# EAGLE board g1ata_stand alone master (EAGLE 9.6.2)
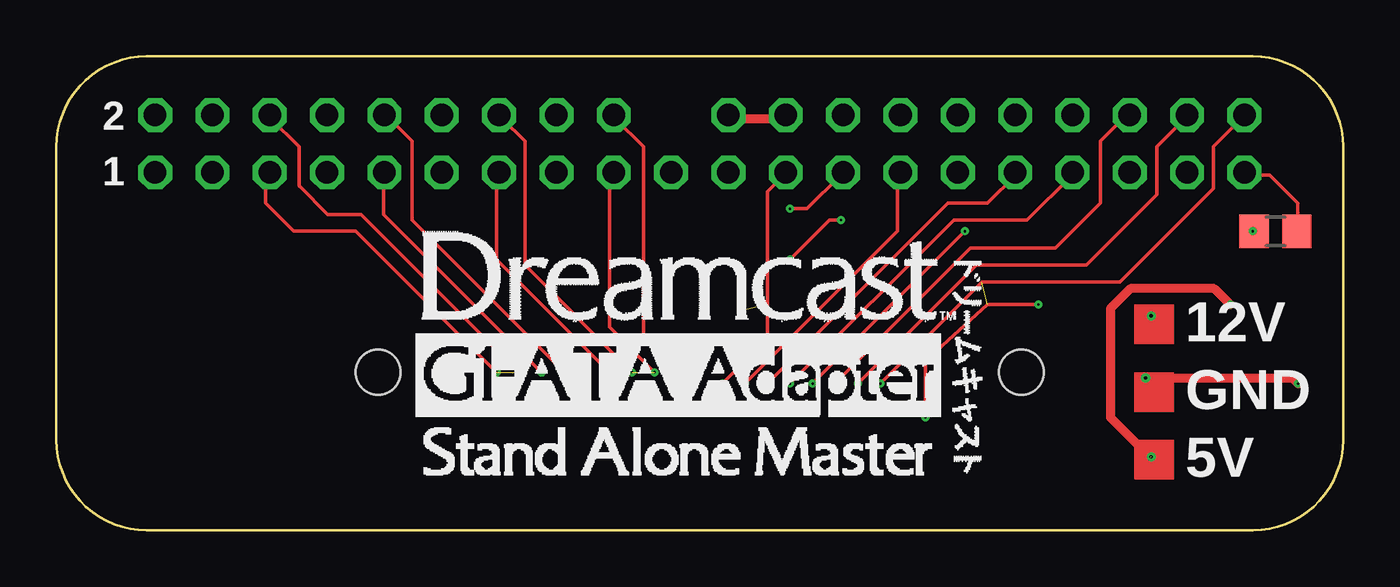
[diagram p0: board, top side]
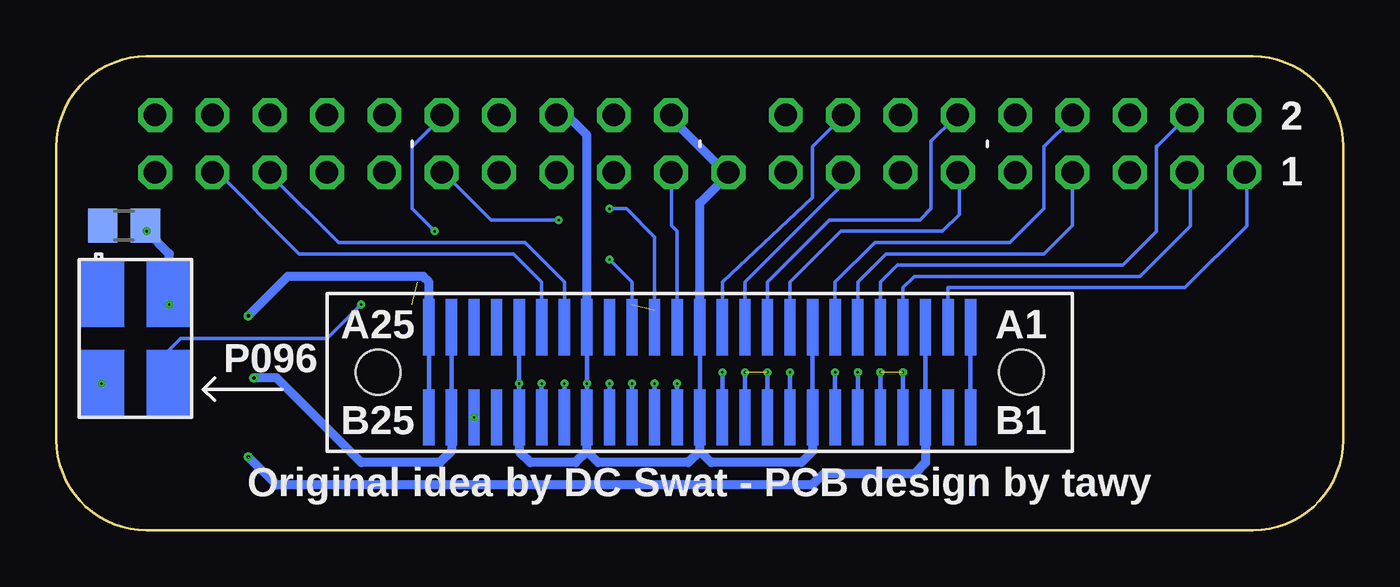
[diagram p1: board, bottom side, seen from below]

Size 57 x 21 mm. Coordinates in mm from the lower left corner, seen from the top.
Outline: 4,21 53,21 arc-90 57,17 57,4 arc-90 53,0 4,0 arc-90 0,4 0,17 arc-90 4,21
Copper layers (1*16): Top 0.035559375mm / dielectric 1.6mm / Bottom 0.035559375mm
Design rules "oshpark-2layer *": minimum track width 6mil, minimum drill 10mil, track to track 6mil, track to pad 6mil, pad to pad 6mil, via to via 6mil, smd to smd 6mil, copper to edge 15mil, drill to drill 6mil, minimum pad ring 5mil, minimum via ring 5mil, stop-mask expansion 2.5mil, vias tented up to drill 10mil, thermal gap 10mil
Holes 2 mm at 14.25,7 42.75,7

## Footprints (pad centres in the part's own frame; a part is rotated, then mirrored left to right if it is on the bottom)
R0805 = smd 1.3 x 1.5: 1 -0.95,0; 2 0.95,0

## Placement (x,y rotation side)
1K5  [R0805]  54,13.5 0 bottom
1K6  [R0805]  54,13.25 0 top

## Library data of the parts
1K5 1K6 = resistor

## Tracks (layer width: path | path; a pad name or v marks a point on that pad's centre or on a via)
5V2  (via drill 0.1, 0.15)  (1 unrouted)
  Top 0.406: v52,10 51.29,10.71 47.58,10.71 46.69,9.82 46.69,5 48.47,3.22
  Bottom 0.406: v48.5,3.25 47.25,2 23.5,2 23,2.5 19,2.5 18.5,3 18.5,4 | 52.5,10.5 v52,10 52,12.25 v53,13.25
12V2  (via drill 0.15)
  Bottom 0.406: 40.5,10 40.5,11 40.75,11.25 46.75,11.25 v48.5,9.5
GND4
  Bottom 0.406: 29.75,18.25 27.25,15.75 28.5,14.5 28.5,9.5
GND5
  Top 0.406: 29.75,18.25 32.25,18.25
P1/A3
  Bottom 0.152: 4.27,15.73 4.27,13.48 7,10.75 17.5,10.75 17.5,10
P3/A2
  Bottom 0.152: 6.77,15.73 6.77,13.48 9,11.25 19,11.25 19.5,10.75 19.5,10
P4/A2
  Bottom 0.152: 8.27,17.02 8.27,13.23 9.75,11.75 19.75,11.75 20.5,11 20.5,10.25
P5/B2  (via drill 0.1)  (1 unrouted)
  Top 0.152: v19.5,7 13.25,13.25 10.51,13.25 9.27,14.5 9.27,15.98
  Bottom 0.203: v19.5,7 19.5,5.5 | 20.5,7 20.5,5.5
P6/B2  (via drill 0.1)
  Top 0.152: 10.77,15.25 12.02,14 13.5,14 v20.5,7
P7/A2
  Bottom 0.152: 21.5,10 21.5,11 20.25,12.25 13.25,12.25 12,13.5 12,15.75
P8/A2
  Bottom 0.152: 12,18.25 13.25,17 13.25,14.25 14.75,12.75 20.75,12.75 22.5,11 22.5,10
P9/B2  (via drill 0.1)
  Top 0.152: 14.5,15.75 14.5,14 v21.5,7
  Bottom 0.203: v21.5,7 21.5,5.75
P10/B2  (via drill 0.1)
  Top 0.152: v22.5,7 15.75,13.75 15.75,17.25 14.75,18.25
  Bottom 0.203: v22.5,7 22.5,5.75
P11/A2
  Bottom 0.152: 17,15.75 17,14 17.75,13.25 22.25,13.25 24.5,11 24.5,10
P12/A2
  Bottom 0.152: 25.5,10 25.5,11 22.75,13.75 18.75,13.75 18.25,14.25 18.25,17.25 17.25,18.25
P13/B2  (via drill 0.1)
  Top 0.152: 19.5,15.75 19.5,12 v24.5,7
  Bottom 0.203: v24.5,7 24.5,5.5
P14/B2  (via drill 0.1)
  Top 0.152: 19.75,18.25 20.75,17.25 20.75,11.75 v25.5,7
P15/A2
  Bottom 0.152: 22,15.5 26.5,11 26.5,9.75
P16/A2
  Bottom 0.152: 27.5,10 27.5,11 23.5,14.75 23.5,17 22.5,18
P17/B2  (via drill 0.1)  (1 unrouted)
  Top 0.152: 24.5,16 24.5,9 v26.5,7
  Bottom 0.203: v26.5,7 26.5,5.25 | 25.5,7 25.5,5.25
P18/B2  (via drill 0.1)
  Top 0.152: 24.75,18.25 26,17 26,8.5 v27.5,7
  Bottom 0.203: v27.5,7 27.5,5.5
P21/A2
  Bottom 0.152: 29.5,10 29.5,13.25 29.75,13.5 29.75,15.75
P23/B2  (via drill 0.1)
  Top 0.152: v29.5,6.5 31.5,8.5 31.5,15 32.25,15.75
  Bottom 0.203: v29.5,6.5 29.5,5.75
P26/A2
  Bottom 0.406: 33.5,10 33.5,17.5 34.75,18.75
P27/B2  (via drill 0.1)
  Top 0.152: 37.25,15.75 37.25,13.25 v30.5,6.5
  Bottom 0.203: v30.5,6.5 30.5,5.5
P29/A2  (via drill 0.1)  (1 unrouted)
  Top 0.152: v32.5,12 34.25,13.75 v34.75,13.75 | v32.5,14.25 33.25,14.25 34.75,15.75
  Bottom 0.152: 30.5,9.75 30.5,13 31.75,14.25 v32.5,14.25 | v32.5,12 31.5,11 31.5,10 | 40,16 37.75,13.75 v34.75,13.75
P30/B2  (via drill 0.1)
  Top 0.152: v40.25,13.25 v33.5,6.5
  Bottom 0.152: v40.25,13.25 41.25,14.25 41.25,17 40,18.25
  Bottom 0.203: 33.5,5.75 v33.5,6.5 33.5,8.25
P31/B2  (via drill 0.1)
  Top 0.152: v31.5,6.5 39.5,14.5 41.25,14.5 42.5,15.75
  Bottom 0.203: v31.5,6.5 31.5,5.5
P33/B2  (via drill 0.1)
  Top 0.152: v32.5,6.5 39.75,13.75 43,13.75 45,15.75
  Bottom 0.203: v32.5,6.5 32.5,5.75
P35/A2
  Bottom 0.152: 34.5,10 34.5,11 36.25,12.75 44.5,12.75 47.5,15.75
P36/B2  (via drill 0.1)
  Top 0.152: v34.5,6.5 40.5,12.5 44.25,12.5 46.25,14.5 46.25,17.25 47.25,18.25
  Bottom 0.203: v34.5,6.5 34.5,5.75
P37/A2
  Bottom 0.152: 35.5,10 35.5,11 36.75,12.25 46.25,12.25 50,16
P38/B2  (via drill 0.1)
  Top 0.152: v35.5,6.5 40.75,11.75 45.62,11.75 48.75,14.88 48.75,17 50,18.25
  Bottom 0.203: v35.5,6.5 35.5,5.75
P40/A2  (via drill 0.1)  (1 unrouted)
  Top 0.152: v36.5,6.5 41,11 47.11,11 51.25,15.14 51.25,17 52.5,18.25 | v38.5,5 38.5,7.5 41.25,10 v43.5,10
  Bottom 0.152: v43.5,10 45,8.5 51.5,8.5 52.25,7.75
  Bottom 0.203: 36.5,5.75 v36.5,6.5 36.5,8
PW_GND2  (via drill 0.1, 0.15 pad 0.1)
  Top 0.406: v55,6.5 54.75,6.75 v48.25,6.75
  Bottom 0.406: v48.25,6.75 47.25,6.75 43.5,3 40,3 39.5,3.5 39.5,4
S$175  (via drill 1 pad 1.3)
  other vias: 52.63,18.4
S$176  (via drill 1 pad 1.3)
  other vias: 50.09,18.4
S$178  (via drill 1 pad 1.3)
  other vias: 47.55,18.4
S$179  (via drill 1 pad 1.3)
  other vias: 45.01,18.4
S$182  (via drill 1 pad 1.3)
  other vias: 42.47,18.4
S$183  (via drill 1 pad 1.3)
  other vias: 39.93,18.4
S$184  (via drill 1 pad 1.3)
  other vias: 37.39,18.4
S$185  (via drill 1 pad 1.3)
  other vias: 34.85,18.4
S$186  (via drill 1 pad 1.3)
  other vias: 32.31,18.4
S$187  (via drill 1 pad 1.3)
  other vias: 29.77,18.4
S$188  (via drill 1 pad 1.3)
  other vias: 27.23,15.86
S$189  (via drill 1 pad 1.3)
  other vias: 24.69,18.4
S$190  (via drill 1 pad 1.3)
  other vias: 22.15,18.4
S$191  (via drill 1 pad 1.3)
  other vias: 19.61,18.4
S$192  (via drill 1 pad 1.3)
  other vias: 17.07,18.4
S$193  (via drill 1 pad 1.3)
  other vias: 14.53,18.4
S$194  (via drill 1 pad 1.3)
  other vias: 11.99,18.4
S$195  (via drill 1 pad 1.3)
  other vias: 9.45,18.4
S$196  (via drill 1 pad 1.3)
  other vias: 6.91,18.4
S$197  (via drill 1 pad 1.3)
  other vias: 4.37,18.4
S$198  (via drill 1 pad 1.3)
  other vias: 52.63,15.86
S$199  (via drill 1 pad 1.3)
  other vias: 50.09,15.86
S$200  (via drill 1 pad 1.3)
  other vias: 47.55,15.86
S$201  (via drill 1 pad 1.3)
  other vias: 45.01,15.86
S$202  (via drill 1 pad 1.3)
  other vias: 42.47,15.86
S$203  (via drill 1 pad 1.3)
  other vias: 39.93,15.86
S$204  (via drill 1 pad 1.3)
  other vias: 37.39,15.86
S$205  (via drill 1 pad 1.3)
  other vias: 34.85,15.86
S$206  (via drill 1 pad 1.3)
  other vias: 32.31,15.86
S$207  (via drill 1 pad 1.3)
  other vias: 29.77,15.86
S$208  (via drill 1 pad 1.3)
  other vias: 24.69,15.86
S$209  (via drill 1 pad 1.3)
  other vias: 22.15,15.86
S$210  (via drill 1 pad 1.3)
  other vias: 19.61,15.86
S$211  (via drill 1 pad 1.3)
  other vias: 17.07,15.86
S$212  (via drill 1 pad 1.3)
  other vias: 14.53,15.86
S$213  (via drill 1 pad 1.3)
  other vias: 11.99,15.86
S$214  (via drill 1 pad 1.3)
  other vias: 9.45,15.86
S$215  (via drill 1 pad 1.3)
  other vias: 6.91,15.86
S$216  (via drill 1 pad 1.3)
  other vias: 4.37,15.86
S$217
  Bottom 0.203: 19.5,8 19.5,8.75
S$218
  Bottom 0.203: 16.5,6 16.5,8.25
S$219
  Bottom 0.203: 18.5,6 18.5,8.25
S$220
  Bottom 0.203: 23.5,5.5 23.5,8.75
S$221
  Bottom 0.203: 28.5,5.5 28.5,8.5
S$222
  Bottom 0.203: 39.5,8.25 39.5,5.75
S$223
  Bottom 0.203: 40.5,8.25 40.5,5.75
S$224
  Bottom 0.152: 7,18.25 8.27,16.98
S$225
  Bottom 0.406: 36.5,4.25 36.5,3.5 36,3 34,3 33.5,3.5 | 33.5,3.5 33.5,4.25 | 33.5,3.5 33,3 29,3 28.5,3.5 | 28.5,3.5 28.5,4.25 | 28.5,3.5 28,3 24,3 23.5,3.5 23.5,4
S$226
  Bottom 0.152: 53,14 53,13.5
S$228
  Top 0.152: 10.75,15.25 10.75,17 9.5,18.25
S$229
  Top 0.152: 52.75,15.75 53.75,15.75 55,14.5 55,13.5
(copper drawn outside any net)
  shapes: Bottom area x54, Top area x3

## Text on the board
tNames: 2 | 1 | 12V | GND | 5V
bNames: 2 | 1 | A1 | A25 | P096 | B1 | B25 | Original idea by DC Swat - PCB design by tawy